# Altium PCB PC110-itx.PcbDoc (part 3 of 16)
Units mm, origin at the board's own origin, x right, y up, seen from the top; angles counter-clockwise.
Board outline 170 x 170 mm, 16 copper layers (FC1, FC2, FC3, FC4, IP1, IC1, IC2, IP2, IP3, IC3, IC4, IP4, BC4, BC3, BC2, BC1), stack 3.903 mm thick; 935 components, 1357 nets, 4698 pads, 3240 vias.
Unrouted connection lines stored in the file: 552.
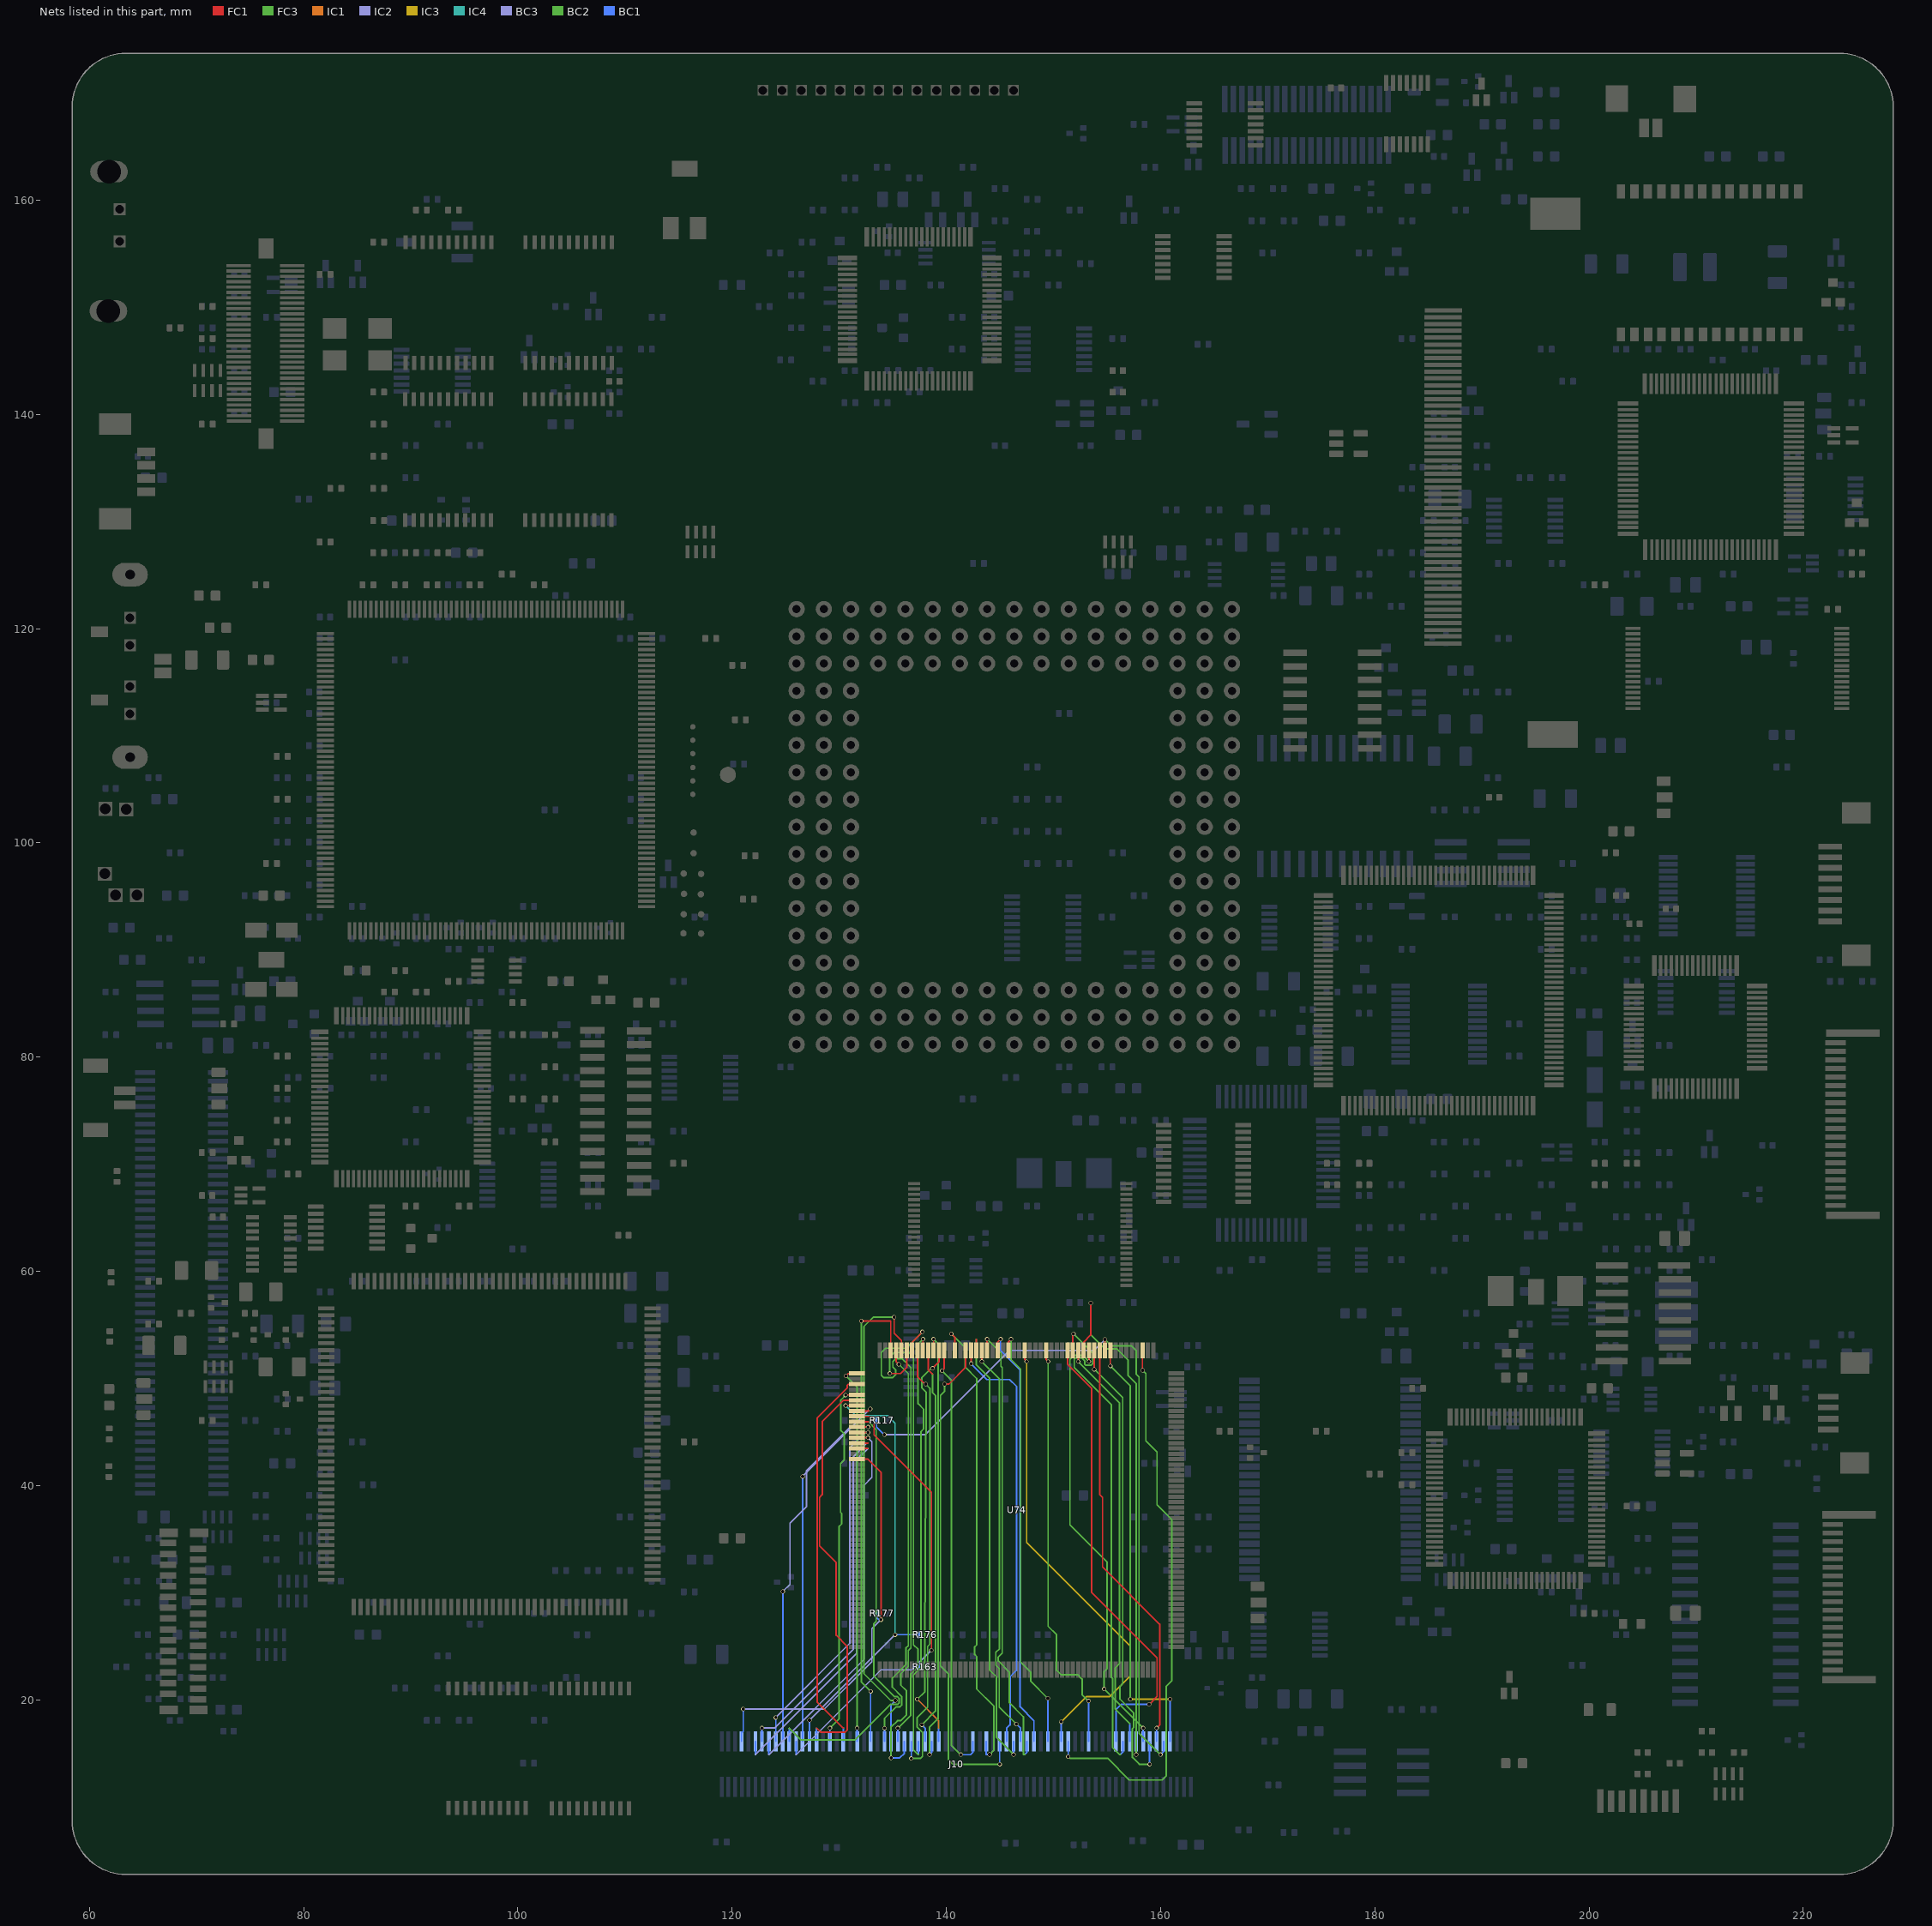
[diagram p17: the nets of this part, all layers, seen from the top]

## Footprints (in the part's own frame and the unit in brackets; to place one, negate y for a bottom-side part, rotate by r counter-clockwise, add the part's x,y. Pads: shape width x height; smd on the part's side, far side on the other; paste and mask are expansions set on the pad) (continued)
QFN-80 [mm]
  rect 0.45x1.8 smd paste-1.8 mask+0: 1(4.55,6.75) 20(-5.15,6.75) 41(-5.15,-6.7) 60(4.55,-6.7)
  rect 0.3x1.8 smd paste-1.8 mask+0: 2(4,6.75) 3(3.5,6.75) 4(3,6.75) 5(2.5,6.75) 6(2,6.75) 7(1.5,6.75) 8(1,6.75) 9(0.5,6.75) 10(0,6.75) 11(-0.5,6.75) 12(-1,6.75) 13(-1.5,6.75) 14(-2,6.75) 15(-2.5,6.75) 16(-3,6.75) 17(-3.5,6.75) 18(-4,6.75) 19(-4.55,6.75) 42(-4.55,-6.7) 43(-4,-6.7) 44(-3.5,-6.7) 45(-3,-6.7) 46(-2.5,-6.7) 47(-2,-6.7) 48(-1.5,-6.7) 49(-1,-6.7) 50(-0.5,-6.7) 51(0,-6.7) 52(0.5,-6.7) 53(1,-6.7) 54(1.5,-6.7) 55(2,-6.7) 56(2.5,-6.7) 57(3,-6.7) 58(3.5,-6.7) 59(4,-6.7)
  rect 1.8x0.45 smd paste-1.8 mask+0: 21(-6.95,4.8) 40(-6.95,-4.8) 61(6.55,-4.8) 80(6.55,4.8)
  rect 1.8x0.3 smd paste-1.8 mask+0: 22(-6.95,4.25) 23(-6.95,3.75) 24(-6.95,3.25) 25(-6.95,2.75) 26(-6.95,2.25) 27(-6.95,1.75) 28(-6.95,1.25) 29(-6.95,0.75) 30(-6.95,0.25) 31(-6.95,-0.25) 32(-6.95,-0.75) 33(-6.95,-1.25) 34(-6.95,-1.75) 35(-6.95,-2.25) 36(-6.95,-2.75) 37(-6.95,-3.25) 38(-6.95,-3.75) 39(-6.95,-4.2) 62(6.55,-4.25) 63(6.55,-3.75) 64(6.55,-3.25) 65(6.55,-2.75) 66(6.55,-2.25) 67(6.55,-1.75) 68(6.55,-1.25) 69(6.55,-0.75) 70(6.55,-0.25) 71(6.55,0.25) 72(6.55,0.75) 73(6.55,1.25) 74(6.55,1.75) 75(6.55,2.25) 76(6.55,2.75) 77(6.55,3.25) 78(6.55,3.75) 79(6.55,4.2)
  silkscreen extent 4.34,4.49 5.06,5.21
QFN-100 [mm]
  rect 0.4x1.9 smd paste-1.9 mask+0: 1(-6.6,-7.575) 25(5.575,-7.575) 51(5.575,7.925) 75(-6.65,7.925)
  rect 0.3x1.9 smd paste-1.9 mask+0: 2(-6,-7.575) 3(-5.5,-7.575) 4(-5,-7.575) 5(-4.5,-7.575) 6(-4,-7.575) 7(-3.5,-7.575) 8(-3,-7.575) 9(-2.5,-7.575) 10(-2,-7.575) 11(-1.5,-7.575) 12(-1,-7.575) 13(-0.5,-7.575) 14(0,-7.575) 15(0.5,-7.575) 16(1,-7.575) 17(1.5,-7.575) 18(2,-7.575) 19(2.5,-7.575) 20(3,-7.575) 21(3.5,-7.575) 22(4,-7.575) 23(4.5,-7.575) 24(5,-7.575) 52(5,7.925) 53(4.5,7.925) 54(4,7.925) 55(3.5,7.925) 56(3,7.925) 57(2.5,7.925) 58(2,7.925) 59(1.5,7.925) 60(1,7.925) 61(0.5,7.925) 62(0,7.925) 63(-0.55,7.925) 64(-1.05,7.925) 65(-1.55,7.925) 66(-2.05,7.925) 67(-2.55,7.925) 68(-3.05,7.925) 69(-3.55,7.925) 70(-4.05,7.925) 71(-4.55,7.925) 72(-5.05,7.925) 73(-5.55,7.925) 74(-6.05,7.925)
  rect 1.9x0.4 smd paste-1.9 mask+0: 26(7.275,-6.075) 50(7.275,6.075) 76(-8.225,6.075) 100(-8.225,-6.075)
  rect 1.9x0.3 smd paste-1.9 mask+0: 27(7.275,-5.5) 28(7.275,-5) 29(7.275,-4.5) 30(7.275,-4) 31(7.275,-3.5) 32(7.275,-3) 33(7.275,-2.5) 34(7.275,-2) 35(7.275,-1.5) 36(7.275,-1) 37(7.275,-0.5) 38(7.275,0) 39(7.275,0.5) 40(7.275,1) 41(7.275,1.5) 42(7.275,2) 43(7.275,2.5) 44(7.275,3) 45(7.275,3.5) 46(7.275,4) 47(7.275,4.5) 48(7.275,5) 49(7.275,5.5) 77(-8.225,5.5) 78(-8.225,5) 79(-8.225,4.5) 80(-8.225,4) 81(-8.225,3.5) 82(-8.225,3) 83(-8.225,2.5) 84(-8.225,2) 85(-8.225,1.5) 86(-8.225,0.95) 87(-8.225,0.5) 88(-8.225,0) 89(-8.225,-0.55) 90(-8.225,-1.05) 91(-8.225,-1.55) 92(-8.225,-2.05) 93(-8.225,-2.5) 94(-8.225,-3) 95(-8.225,-3.5) 96(-8.225,-4.05) 97(-8.225,-4.5) 98(-8.225,-5.05) 99(-8.225,-5.5)
  silkscreen extent -8.89,-8.04 -7.91,-7.06
QFP208 [mm]
  rect 1.6x0.3 smd paste-1.6 mask+0: 1(-15,12.75) 2(-15,12.25) 3(-15,11.75) 4(-15,11.25) 5(-15,10.75) 6(-15,10.25) 7(-15,9.75) 8(-15,9.25) 9(-15,8.75) 10(-15,8.25) 11(-15,7.75) 12(-15,7.25) 13(-15,6.75) 14(-15,6.25) 15(-15,5.75) 16(-15,5.25) 17(-15,4.75) 18(-15,4.25) 19(-15,3.75) 20(-15,3.25) 21(-15,2.75) 22(-15,2.25) 23(-15,1.75) 24(-15,1.25) 25(-15,0.75) 26(-15,0.25) 27(-15,-0.25) 28(-15,-0.75) 29(-15,-1.25) 30(-15,-1.75) 31(-15,-2.25) 32(-15,-2.75) 33(-15,-3.25) 34(-15,-3.75) 35(-15,-4.25) 36(-15,-4.75) 37(-15,-5.25) 38(-15,-5.75) 39(-15,-6.25) 40(-15,-6.75) 41(-15,-7.25) 42(-15,-7.75) 43(-15,-8.25) 44(-15,-8.75) 45(-15,-9.25) 46(-15,-9.75) 47(-15,-10.25) 48(-15,-10.75) 49(-15,-11.25) 50(-15,-11.75) 51(-15,-12.25) 52(-15,-12.75) 105(15,-12.75) 106(15,-12.25) 107(15,-11.75) 108(15,-11.25) 109(15,-10.75) 110(15,-10.25) 111(15,-9.75) 112(15,-9.25) 113(15,-8.75) 114(15,-8.25) 115(15,-7.75) 116(15,-7.25) 117(15,-6.75) 118(15,-6.25) 119(15,-5.75) 120(15,-5.25) 121(15,-4.75) 122(15,-4.25) 123(15,-3.75) 124(15,-3.25) 125(15,-2.75) 126(15,-2.25) 127(15,-1.75) 128(15,-1.25) 129(15,-0.75) 130(15,-0.25) 131(15,0.25) 132(15,0.75) 133(15,1.25) 134(15,1.75) 135(15,2.25) 136(15,2.75) 137(15,3.25) 138(15,3.75) 139(15,4.25) 140(15,4.75) 141(15,5.25) 142(15,5.75) 143(15,6.25) 144(15,6.75) 145(15,7.25) 146(15,7.75) 147(15,8.25) 148(15,8.75) 149(15,9.25) 150(15,9.75) 151(15,10.25) 152(15,10.75) 153(15,11.25) 154(15,11.75) 155(15,12.25) 156(15,12.75)
  rect 0.3x1.6 smd paste-1.6 mask+0: 53(-12.75,-15) 54(-12.25,-15) 55(-11.75,-15) 56(-11.25,-15) 57(-10.75,-15) 58(-10.25,-15) 59(-9.75,-15) 60(-9.25,-15) 61(-8.75,-15) 62(-8.25,-15) 63(-7.75,-15) 64(-7.25,-15) 65(-6.75,-15) 66(-6.25,-15) 67(-5.75,-15) 68(-5.25,-15) 69(-4.75,-15) 70(-4.25,-15) 71(-3.75,-15) 72(-3.25,-15) 73(-2.75,-15) 74(-2.25,-15) 75(-1.75,-15) 76(-1.25,-15) 77(-0.75,-15) 78(-0.25,-15) 79(0.25,-15) 80(0.75,-15) 81(1.25,-15) 82(1.75,-15) 83(2.25,-15) 84(2.75,-15) 85(3.25,-15) 86(3.75,-15) 87(4.25,-15) 88(4.75,-15) 89(5.25,-15) 90(5.75,-15) 91(6.25,-15) 92(6.75,-15) 93(7.25,-15) 94(7.75,-15) 95(8.25,-15) 96(8.75,-15) 97(9.25,-15) 98(9.75,-15) 99(10.25,-15) 100(10.75,-15) 101(11.25,-15) 102(11.75,-15) 103(12.25,-15) 104(12.75,-15) 157(12.75,15) 158(12.25,15) 159(11.75,15) 160(11.25,15) 161(10.75,15) 162(10.25,15) 163(9.75,15) 164(9.25,15) 165(8.75,15) 166(8.25,15) 167(7.75,15) 168(7.25,15) 169(6.75,15) 170(6.25,15) 171(5.75,15) 172(5.25,15) 173(4.75,15) 174(4.25,15) 175(3.75,15) 176(3.25,15) 177(2.75,15) 178(2.25,15) 179(1.75,15) 180(1.25,15) 181(0.75,15) 182(0.25,15) 183(-0.25,15) 184(-0.75,15) 185(-1.25,15) 186(-1.75,15) 187(-2.25,15) 188(-2.75,15) 189(-3.25,15) 190(-3.75,15) 191(-4.25,15) 192(-4.75,15) 193(-5.25,15) 194(-5.75,15) 195(-6.25,15) 196(-6.75,15) 197(-7.25,15) 198(-7.75,15) 199(-8.25,15) 200(-8.75,15) 201(-9.25,15) 202(-9.75,15) 203(-10.25,15) 204(-10.75,15) 205(-11.25,15) 206(-11.75,15) 207(-12.25,15) 208(-12.75,15)
  silkscreen extent -15.7,-14.12 14.12,14.12
R-array#1 [mm]
  rect 0.35x1.2 smd paste-1.2 mask+0: 1(-1.225,-1) 2(-0.425,-1) 3(0.375,-1) 4(1.175,-1) 5(1.175,0.85) 6(0.375,0.85) 7(-0.45,0.85) 8(-1.225,0.85)
R-array#2 [mm]
  rect 0.35x1.2 smd paste-1.2 mask+0: 1(1.225,1) 2(0.425,1) 3(-0.375,1) 4(-1.175,1) 5(-1.175,-0.85) 6(-0.375,-0.85) 7(0.45,-0.85) 8(1.225,-0.85)
R_0402_1005Metric#1 [mm]
  rrect25% 0.54x0.64 smd paste-0.64 mask+0: 1(0.51,0) 2(-0.51,0)
  silkscreen extent -0.95,-0.5 0.95,0.5
R_0402_1005Metric#2 [mm]
  rrect25% 0.54x0.64 smd paste-0.64 mask+0: 1(-0.51,0) 2(0.51,0)
  silkscreen extent -0.95,-0.5 0.95,0.5
R_0603_1608Metric#1 [mm]
  rrect25% 0.8x0.95 smd paste-0.95 mask+0: 1(0.825,0) 2(-0.825,0)
  silkscreen extent -1.5,-0.8 1.5,0.8
R_0603_1608Metric#2 [mm]
  rrect25% 0.8x0.95 smd paste-0.95 mask+0: 1(-0.825,0) 2(0.825,0)
  silkscreen extent -1.5,-0.8 1.5,0.8
R_0805_2012Metric#1 [mm]
  rrect24% 1.025x1.4 smd paste-1.4 mask+0: 1(0.913,0) 2(-0.913,0)
  silkscreen extent -0.23,-0.73 0.23,0.74
R_0805_2012Metric#2 [mm]
  rrect24% 1.025x1.4 smd paste-1.4 mask+0: 1(-0.912,0) 2(0.913,0)
  silkscreen extent -1.7,-1 1.7,1
R_1206_3216Metric [mm]
  rrect22% 1.125x1.75 smd paste-1.75 mask+0: 1(1.462,0) 2(-1.462,0)
  silkscreen extent -2.3,-1.2 2.3,1.2
R_1206_3216Metric_Pad1.30x1.75mm_HandSolder [mm]
  rrect19% 1.3x1.75 smd paste-1.75 mask+0: 1(-1.55,0) 2(1.55,0)
  silkscreen extent -0.73,-0.91 0.73,0.91
"RAM Module" [mm]
  rect 2.3x0.3 smd paste-2.3 mask+0: 1(2.5,7.4) 2(2.5,6.9) 3(2.5,6.4) 4(2.5,5.9) 5(2.5,5.4) 6(2.5,4.9) 7(2.5,4.4) 8(2.5,3.9) 9(2.5,3.4) 10(2.5,2.9) 11(2.55,2.4) 12(2.55,1.9) 13(2.55,1.4) 14(2.55,0.9) 15(2.55,0.4) 16(2.55,-0.1) 17(2.55,-0.6) 18(2.55,-1.1) 19(2.55,-1.6) 20(2.55,-2.1) 21(2.55,-2.6) 22(2.55,-3.1) 23(2.55,-3.6) 24(2.55,-4.1) 25(2.55,-4.6) 26(2.55,-5.1) 27(2.55,-5.6) 28(2.55,-6.1) 29(2.55,-6.6) 30(2.55,-7.1) 31(-2.45,-7.1) 32(-2.45,-6.6) 33(-2.45,-6.1) 34(-2.45,-5.6) 35(-2.45,-5.1) 36(-2.45,-4.6) 37(-2.45,-4.1) 38(-2.45,-3.6) 39(-2.45,-3.1) 40(-2.45,-2.6) 41(-2.45,-2.1) 42(-2.45,-1.6) 43(-2.45,-1.1) 44(-2.45,-0.6) 45(-2.45,-0.1) 46(-2.45,0.4) 47(-2.45,0.9) 48(-2.45,1.4) 49(-2.45,1.9) 50(-2.45,2.4) 51(-2.45,2.9) 52(-2.45,3.4) 53(-2.45,3.9) 54(-2.45,4.4) 55(-2.45,4.9) 56(-2.45,5.4) 57(-2.45,5.9) 58(-2.45,6.4) 59(-2.45,6.9) 60(-2.45,7.4)
  rect 1.4x1.9 smd paste-1.9 mask+0: 61(0,9.05) 62(0,-8.7)
RAMchip [mm]
  rect 0.4x1.3 smd paste-1.3 mask+0: 1(9.225,5.475) 2(8.425,5.475) 3(7.625,5.475) 4(6.825,5.475) 5(6.025,5.475) 6(5.225,5.475) 7(4.425,5.475) 8(3.625,5.475) 9(2.825,5.475) 10(2.025,5.475) 11(1.175,5.475) 12(-2.025,5.475) 13(-2.825,5.475) 14(-3.625,5.475) 15(-4.425,5.475) 16(-5.225,5.475) 17(-6.025,5.475) 18(-6.825,5.475) 19(-7.625,5.475) 20(-8.425,5.475) 21(-9.225,5.475) 22(-10.025,5.475) 23(-10.025,-5.8) 24(-9.225,-5.8) 25(-8.425,-5.8) 26(-7.625,-5.8) 27(-6.825,-5.8) 28(-6.025,-5.8) 29(-5.225,-5.8) 30(-4.425,-5.8) 31(-3.625,-5.8) 32(-2.775,-5.8) 33(-2.025,-5.8) 34(1.175,-5.8) 35(2.025,-5.8) 36(2.825,-5.8) 37(3.625,-5.8) 38(4.425,-5.8) 39(5.225,-5.8) 40(6.025,-5.8) 41(6.825,-5.8) 42(7.625,-5.8) 43(8.425,-5.8) 44(9.225,-5.8)
  silkscreen extent 8.67,3.56 9.39,4.29
SanDisk [mm]
  rect 0.8x1.3 smd paste-1.3 mask+0: 1(7.65,6.375) 2(6.35,6.375) 3(5.1,6.375) 4(3.8,6.375) 5(2.55,6.375) 6(1.25,6.375) 7(0,6.375) 8(-1.3,6.375) 9(-2.55,6.375) 10(-3.85,6.375) 11(-5.1,6.375) 12(-6.4,6.375) 13(-7.65,6.375) 14(-8.9,6.375) 15(-8.9,-6.975) 16(-7.65,-6.975) 17(-6.35,-6.975) 18(-5.1,-6.975) 19(-3.8,-6.975) 20(-2.55,-6.975) 21(-1.25,-6.975) 22(0,-6.975) 23(1.3,-6.975) 24(2.55,-6.975) 25(3.85,-6.975) 26(5.1,-6.975) 27(6.4,-6.975) 28(7.65,-6.975)
  silkscreen extent 7.14,4.31 7.86,5.04
SOIC-8 [mm]
  rect 3x0.6 smd paste-3 mask+0: 1(2.95,-1.95) 2(2.95,-0.65) 3(2.95,0.6) 4(2.95,1.9) 5(-2.9,1.905) 6(-2.9,0.635) 7(-2.9,-0.65) 8(-2.9,-1.95)
  silkscreen extent -1.95,-2.8 2.94,2.56
SOIC-8-narrow [mm]
  rect 2.5x0.6 smd paste-2.5 mask+0: 1(2.8,-1.8) 2(2.85,-0.5) 3(2.85,0.75) 4(2.85,2) 5(-2.3,2) 6(-2.3,0.75) 7(-2.35,-0.5) 8(-2.35,-1.75)
  silkscreen extent 0.83,-1.57 1.47,-0.93
soic-8-small [mm]
  rect 1.3x0.35 smd paste-1.3 mask+0: 1(2.95,-0.95) 2(2.95,-0.3) 3(2.95,0.35) 4(2.95,1) 5(-2.95,1) 6(-2.95,0.35) 7(-2.95,-0.3) 8(-2.95,-0.95)
  silkscreen extent 1.67,-0.98 2.03,-0.62
SOIC-16W [mm]
  rect 3x0.6 smd paste-3 mask+0: 1(-2.85,4.445) 2(-2.85,3.175) 3(-2.85,1.905) 4(-2.85,0.65) 5(-2.85,-0.635) 6(-2.85,-1.9) 7(-2.85,-3.175) 8(-2.9,-4.445) 9(3,-4.45) 10(3,-3.175) 11(3,-1.9) 12(3,-0.65) 13(3,0.65) 14(3,1.95) 15(3,3.175) 16(2.95,4.45)
  silkscreen extent -3.79,-5.21 2.76,5.34
SOP48 [mm]
  rect 1.9x0.6 smd paste-1.9 mask+0: 1(-7.3,9.55) 2(-7.3,8.75) 3(-7.3,7.95) 4(-7.3,7.15) 5(-7.3,6.35) 6(-7.3,5.55) 7(-7.3,4.75) 8(-7.3,3.95) 9(-7.3,3.15) 10(-7.3,2.35) 11(-7.3,1.55) 12(-7.3,0.75) 13(-7.3,-0.05) 14(-7.3,-0.85) 15(-7.3,-1.65) 16(-7.3,-2.45) 17(-7.3,-3.25) 18(-7.3,-4.05) 19(-7.3,-4.85) 20(-7.3,-5.65) 21(-7.3,-6.45) 22(-7.3,-7.25) 23(-7.3,-8.05) 24(-7.3,-8.85) 25(7.75,-8.85) 26(7.75,-8.05) 27(7.75,-7.25) 28(7.75,-6.45) 29(7.75,-5.65) 30(7.75,-4.85) 31(7.75,-4.05) 32(7.75,-3.25) 33(7.75,-2.45) 34(7.75,-1.65) 35(7.75,-0.85) 36(7.75,-0.05) 37(7.75,0.75) 38(7.75,1.55) 39(7.75,2.35) 40(7.75,3.15) 41(7.75,3.95) 42(7.775,4.75) 43(7.775,5.55) 44(7.775,6.35) 45(7.775,7.15) 46(7.775,7.95) 47(7.775,8.75) 48(7.775,9.55)
  silkscreen extent -5.33,8.27 -4.27,9.33
SOP-16 [mm]
  rect 2.2x0.6 smd paste-2.2 mask+0: 1(3.45,-4.45) 2(3.45,-3.175) 3(3.45,-1.9) 4(3.45,-0.635) 5(3.45,0.635) 6(3.45,1.905) 7(3.45,3.2) 8(3.45,4.445) 9(-3.5,4.445) 10(-3.5,3.175) 11(-3.5,1.905) 12(-3.5,0.635) 13(-3.5,-0.635) 14(-3.5,-1.95) 15(-3.5,-3.2) 16(-3.5,-4.45)
  silkscreen extent -2.39,-5.34 3.4,5.26
SOP-24 [mm]
  rect 0.6x2.5 smd paste-2.5 mask+0: 1(-6.7,-4.75) 2(-5.45,-4.75) 3(-4.15,-4.75) 4(-2.85,-4.75) 5(-1.6,-4.75) 6(-0.3,-4.75) 7(0.95,-4.75) 8(2.2,-4.75) 9(3.5,-4.75) 10(4.75,-4.75) 11(6.05,-4.75) 12(7.3,-4.75) 13(7.3,6.05) 14(6.05,6.05) 15(4.75,6.05) 16(3.5,6.05) 17(2.25,6.05) 18(0.95,6.05) 19(-0.3,6.05) 20(-1.6,6.05) 21(-2.85,6.05) 22(-4.15,6.05) 23(-5.4,6.05) 24(-6.7,6.05)
  silkscreen extent -7.12,-2.82 -6.28,-1.98
SOT-23#1 [mm]
  rrect25% 1.475x0.6 smd paste-1.475 mask+0: 1(0.938,-0.95) 2(0.938,0.95) 3(-0.937,0)
  silkscreen extent -0.65,-1.84 1.4,1.56
SOT-23#2 [mm]
  rrect25% 0.9x0.8 smd paste-0.9 mask+0: 1(1,-0.95) 2(1,0.95) 3(-1,0)
  silkscreen extent -1.8,-1.8 1.8,1.8
SOT-23#3 [mm]
  rrect25% 0.9x0.8 smd paste-0.9 mask+0: 1(-1,0.95) 2(-1,-0.95) 3(1,0)
  silkscreen extent -1.8,-1.8 1.8,1.8
SOT-23-5#1 [mm]
  rrect25% 1.325x0.6 smd paste-1.325 mask+0: 1(-1.138,0.95) 2(-1.138,0) 3(-1.138,-0.95) 4(1.138,-0.95) 5(1.138,0.95)
  silkscreen extent -1.54,-1.56 0.8,1.84
SOT-23-5#2 [mm]
  rrect25% 1.325x0.6 smd paste-1.325 mask+0: 1(1.137,-0.95) 2(1.137,0) 3(1.137,0.95) 4(-1.137,0.95) 5(-1.137,-0.95)
  silkscreen extent -0.8,-1.84 1.54,1.56
SOT-89-3#1 [mm]
  rrect25% 1.3x0.9 smd paste-1.3 mask+0: 1(-1.95,1.5) 3(-1.95,-1.5)
  rect 1.475x0.9 smd paste-1.475 mask+0: 2(-1.862,0)
  FC1 region: 2,-0.867 -1.125,-0.867 -1.125,0.867 2,0.867
  silkscreen extent -2.01,-2.36 1.36,2.54
SOT-89-3#2 [mm]
  rrect25% 1.3x0.9 smd paste-1.3 mask+0: 1(1.95,-1.5) 3(1.95,1.5)
  rect 1.475x0.9 smd paste-1.475 mask+0: 2(1.862,0)
  FC1 region: -2,-0.867 1.125,-0.867 1.125,0.867 -2,0.867
  silkscreen extent -1.36,-2.54 2.01,2.36
SOT-353#1 [mm]
  rect 1.2x0.4 smd paste-1.2 mask+0: 1(-0.85,0.65) 2(-0.85,0) 3(-0.85,-0.65) 4(0.85,-0.65) 5(0.85,0.65)
  silkscreen extent -1.32,-1.16 0.7,1.44
SOT-353#2 [mm]
  rect 1.2x0.4 smd paste-1.2 mask+0: 1(0.85,-0.65) 2(0.85,0) 3(0.85,0.65) 4(-0.85,0.65) 5(-0.85,-0.65)
  silkscreen extent -0.7,-1.44 1.32,1.16
SOT-416#1 [mm]
  rrect25% 0.6x0.5 smd paste-0.6 mask+0: 1(0.65,-0.5) 2(0.65,0.5) 3(-0.65,0)
  silkscreen extent -0.51,-0.96 1.45,0.96
SOT-416#2 [mm]
  rrect25% 0.6x0.5 smd paste-0.6 mask+0: 1(-0.65,0.5) 2(-0.65,-0.5) 3(0.65,0)
  silkscreen extent -1.45,-0.96 0.51,0.96
SOT-416L#1 [mm]
  rect 0.6x1.1 smd paste-1.1 mask+0: 1(-0.45,0.75) 2(0.55,0.75) 3(0.05,-0.8)
SOT-416L#2 [mm]
  rect 0.6x1.1 smd paste-1.1 mask+0: 1(0.45,-0.75) 2(-0.55,-0.75) 3(-0.05,0.8)
SOT-523 [mm]
  rrect25% 0.51x0.4 smd paste-0.51 mask+0: 1(0.645,-0.5) 2(0.645,0.5) 3(-0.645,0)
  silkscreen extent -0.65,-0.9 1.4,0.9
SPKR [mm]
  rect 0.8x2 smd paste-2 mask+0: 1(0.65,-2.2) 2(-0.65,-2.2)
  rect 1.3x2.3 smd paste-2.3 mask+0: 3(3,0.5) 4(-3,0.5)
  Edge.Cuts circle w0.254: c-1.7,1.75 r0.424
  Edge.Cuts circle w0.254: c1.7,1.75 r0.424
sso-8#1 [mm]
  rect 1.2x0.4 smd paste-1.2 mask+0: 1(-1.75,0.95) 2(-1.75,0.3) 3(-1.75,-0.35) 4(-1.75,-1) 5(1.75,-1) 6(1.75,-0.35) 7(1.75,0.3) 8(1.75,0.95)
  silkscreen extent -1.01,0.59 -0.69,0.91
sso-8#2 [mm]
  rect 1.2x0.4 smd paste-1.2 mask+0: 1(1.75,-0.95) 2(1.75,-0.3) 3(1.75,0.35) 4(1.75,1) 5(-1.75,1) 6(-1.75,0.35) 7(-1.75,-0.3) 8(-1.75,-0.95)
  silkscreen extent 0.69,-0.91 1.01,-0.59
SSOP-8_2.95x2.8mm_P0.65mm [mm]
  rect 1.6x0.3 smd paste-1.6 mask+0: 1(1.7,-0.975) 2(1.7,-0.325) 3(1.7,0.325) 4(1.7,0.975) 5(-1.7,0.975) 6(-1.7,0.325) 7(-1.7,-0.325) 8(-1.7,-0.975)
  silkscreen extent -1.5,-1.73 2.09,1.5
SSOP-24_5.3x8.2mm_P0.65mm [mm]
  rect 1.75x0.45 smd paste-1.75 mask+0: 1(3.6,-3.575) 2(3.6,-2.925) 3(3.6,-2.275) 4(3.6,-1.625) 5(3.6,-0.975) 6(3.6,-0.325) 7(3.6,0.325) 8(3.6,0.975) 9(3.6,1.625) 10(3.6,2.275) 11(3.6,2.925) 12(3.6,3.575) 13(-3.6,3.575) 14(-3.6,2.925) 15(-3.6,2.275) 16(-3.6,1.625) 17(-3.6,0.975) 18(-3.6,0.325) 19(-3.6,-0.325) 20(-3.6,-0.975) 21(-3.6,-1.625) 22(-3.6,-2.275) 23(-3.6,-2.925) 24(-3.6,-3.575)
  silkscreen extent -2.87,-4.41 3.61,4.33
SSOP-28 [mm]
  rect 0.6x2.4 smd paste-2.4 mask+0: 1(-7.85,-5.25) 2(-6.6,-5.25) 3(-5.3,-5.25) 4(-4.05,-5.25) 5(-2.75,-5.25) 6(-1.5,-5.25) 7(-0.2,-5.25) 8(1.05,-5.25) 9(2.35,-5.25) 10(3.6,-5.25) 11(4.9,-5.25) 12(6.15,-5.25) 13(7.4,-5.25) 14(8.7,-5.25) 15(8.7,4.175) 16(7.45,4.175) 17(6.15,4.175) 18(4.9,4.175) 19(3.6,4.175) 20(2.35,4.175) 21(1.1,4.175) 22(-0.2,4.175) 23(-1.5,4.175) 24(-2.8,4.175) 25(-4.05,4.175) 26(-5.3,4.175) 27(-6.6,4.175) 28(-7.85,4.175)
  silkscreen extent -7.78,-3.48 -6.62,-2.32
Switch [mm]
  rect 1.1x1.1 hole 0.8 paste-2539.97 mask+0: 1(0.95,3.25) 2(0.95,0.25)
  rrect100% 3.5x2 hole 2.2 slot 0.8 at 90 deg paste-2539.97 mask+0: 3(-0.1,-6.25) 3(-0.05,6.75)
TestPoint_Pad_D1.5mm [mm]
  round 1.5 smd paste-1.5 mask+0: 1(0,0)
  silkscreen extent -0.95,-0.95 0.95,0.95
TSOP-5_1.65x3.05mm_P0.95mm [mm]
  rect 0.7x0.51 smd paste-0.7 mask+0: 1(1.16,-0.95) 2(1.16,0) 3(1.16,0.95) 4(-1.16,0.95) 5(-1.16,-0.95)
  silkscreen extent -0.8,-1.78 1.49,1.6
TSOT-23#1 [mm]
  rrect25% 1.22x0.65 smd paste-1.22 mask+0: 1(1.31,-0.95) 2(1.31,0.95) 3(-1.31,0)
  silkscreen extent -2.2,-1.8 2.2,1.8
TSOT-23#2 [mm]
  rect 0.7x1.4 smd paste-1.4 mask+0: 1(-0.65,0.9) 2(0,-1) 3(0.65,0.9)
TSOT-23#3 [mm]
  rect 0.7x1.4 smd paste-1.4 mask+0: 1(0.65,-0.9) 2(0,1) 3(-0.65,-0.9)
TSSOP-14_4.4x5mm_P0.65mm#1 [mm]
  rrect25% 1.475x0.4 smd paste-1.475 mask+0: 1(2.862,-1.95) 2(2.862,-1.3) 3(2.862,-0.65) 4(2.862,0) 5(2.862,0.65) 6(2.862,1.3) 7(2.862,1.95) 8(-2.863,1.95) 9(-2.863,1.3) 10(-2.863,0.65) 11(-2.863,0) 12(-2.863,-0.65) 13(-2.863,-1.3) 14(-2.863,-1.95)
  silkscreen extent -2.2,-2.74 3.14,2.61
TSSOP-14_4.4x5mm_P0.65mm#2 [mm]
  rrect25% 1.475x0.4 smd paste-1.475 mask+0: 1(-2.862,1.95) 2(-2.862,1.3) 3(-2.862,0.65) 4(-2.862,0) 5(-2.862,-0.65) 6(-2.862,-1.3) 7(-2.862,-1.95) 8(2.862,-1.95) 9(2.862,-1.3) 10(2.862,-0.65) 11(2.862,0) 12(2.862,0.65) 13(2.862,1.3) 14(2.862,1.95)
  silkscreen extent -3.14,-2.61 2.2,2.74
TSSOP-16_4.4x5mm_P0.65mm [mm]
  rrect25% 1.475x0.4 smd paste-1.475 mask+0: 1(2.862,-2.275) 2(2.862,-1.625) 3(2.862,-0.975) 4(2.862,-0.325) 5(2.862,0.325) 6(2.862,0.975) 7(2.862,1.625) 8(2.862,2.275) 9(-2.863,2.275) 10(-2.863,1.625) 11(-2.863,0.975) 12(-2.863,0.325) 13(-2.863,-0.325) 14(-2.863,-0.975) 15(-2.863,-1.625) 16(-2.863,-2.275)
  silkscreen extent -2.2,-2.74 4.19,2.73
TSSOP-20_4.4x6.5mm_P0.65mm [mm]
  rrect25% 1.475x0.4 smd paste-1.475 mask+0: 1(2.862,-2.925) 2(2.862,-2.275) 3(2.862,-1.625) 4(2.862,-0.975) 5(2.862,-0.325) 6(2.862,0.325) 7(2.862,0.975) 8(2.862,1.625) 9(2.862,2.275) 10(2.862,2.925) 11(-2.863,2.925) 12(-2.863,2.275) 13(-2.863,1.625) 14(-2.863,0.975) 15(-2.863,0.325) 16(-2.863,-0.325) 17(-2.863,-0.975) 18(-2.863,-1.625) 19(-2.863,-2.275) 20(-2.863,-2.925)
  silkscreen extent -2.2,-3.38 4.19,3.39
TSSOP-24_6.1x7.8mm_P0.65mm [mm]
  rrect25% 1.475x0.4 smd paste-1.475 mask+0: 1(-3.712,3.575) 2(-3.712,2.925) 3(-3.712,2.275) 4(-3.712,1.625) 5(-3.712,0.975) 6(-3.712,0.325) 7(-3.712,-0.325) 8(-3.712,-0.975) 9(-3.712,-1.625) 10(-3.712,-2.275) 11(-3.712,-2.925) 12(-3.712,-3.575) 13(3.712,-3.575) 14(3.712,-2.925) 15(3.712,-2.275) 16(3.712,-1.625) 17(3.712,-0.975) 18(3.712,-0.325) 19(3.712,0.325) 20(3.712,0.975) 21(3.712,1.625) 22(3.712,2.275) 23(3.712,2.925) 24(3.712,3.575)
  silkscreen extent -5.04,-4.04 3.05,4.04
TSSOP-30_6.1x9.7mm_P0.65mm [mm]
  rrect25% 1.475x0.4 smd paste-1.475 mask+0: 1(3.713,-4.55) 2(3.713,-3.9) 3(3.713,-3.25) 4(3.713,-2.6) 5(3.713,-1.95) 6(3.713,-1.3) 7(3.713,-0.65) 8(3.713,0) 9(3.713,0.65) 10(3.713,1.3) 11(3.713,1.95) 12(3.713,2.6) 13(3.713,3.25) 14(3.713,3.9) 15(3.713,4.55) 16(-3.712,4.55) 17(-3.712,3.9) 18(-3.712,3.25) 19(-3.712,2.6) 20(-3.712,1.95) 21(-3.712,1.3) 22(-3.712,0.65) 23(-3.712,0) 24(-3.712,-0.65) 25(-3.712,-1.3) 26(-3.712,-1.95) 27(-3.712,-2.6) 28(-3.712,-3.25) 29(-3.712,-3.9) 30(-3.712,-4.55)
  silkscreen extent -3.05,-5.01 5.04,5.01
XTAL-1 [mm]
  rect 2.4x2.8 smd paste-2.8 mask+0: 1(3.25,-0.1) 2(-3.25,-0.1)
  rect 1.5x2.4 smd paste-2.4 mask-2.4: 3(-0.05,0)
  FC1 region: -4.05,1.65 -1.7,1.65 -1.7,-1.8 -4.05,-1.8 -4.05,-2.4 4.05,-2.4 4.05,-1.8 1.7,-1.8 1.7,1.65 4.05,1.65 4.05,2.2 -4.05,2.2
XTAL-2 [mm]
  rect 1.5x2.1 smd paste-2.1 mask+0: 1(1.3,-5.55) 2(-1.25,-5.55)
  rect 2.4x1.5 smd paste-2.4 mask-2.4: 3(0.05,0)
  FC1 region: 1.4,-3.45 1.2,-3.45 1.2,-4.15 0.2,-4.15 0.2,-6.5 -0.15,-6.5 -0.15,-4.15 -1.1,-4.15 -1.1,-3.5 -1.3,-3.5 -1.3,6.75 1.4,6.75
XTAL-3 [mm]
  rect 2x1.4 smd paste-2 mask+0: 1(1.45,2.75) 2(1.45,-2.75) 3(-1.45,-2.75) 4(-1.45,2.75)
  rect 2.4x1.5 smd paste-2.4 mask-2.4: 5(0,0)
  FC1 region: 1.5,3.8 0.1,3.8 0.1,1.7 1.5,1.7 1.5,-1.7 0.1,-1.7 0.1,-3.8 1.55,-3.8 1.55,-3.9 -1.55,-3.9 -1.55,-3.8 -0.1,-3.8 -0.1,-1.7 -1.5,-1.7 -1.5,1.7 -0.1,1.7 -0.1,3.8 -1.55,3.8 -1.55,3.95 1.5,3.95
XTAL-4 [mm]
  rect 4x1.5 smd paste-4 mask+0: 1(0.15,-2.2) 2(0.15,2.1) 3(0.15,-0.08)
XTAL-5 [mm]
  rect 1.5x2.4 smd paste-2.4 mask+0: 1(0,3.2) 2(0,-3.4)
  rect 1.5x2.4 smd paste-2.4 mask-2.4: 3(0,0)
  FC1 region: 1.15,1.65 -1.15,1.65 -1.15,3.3 -1.3,3.3 -1.3,-3.5 -1.1,-3.5 -1.1,-1.85 1.1,-1.85 1.1,-3.5 1.3,-3.5 1.3,3.35 1.15,3.35
XTAL-6 [mm]
  rect 2.4x2.8 smd paste-2.8 mask+0: 1(-3.25,0.1) 2(3.25,0.1)
  rect 1.5x2.4 smd paste-2.4 mask-2.4: 3(0.05,0)
  FC1 region: 1.725,1.8 1.7,1.8 1.7,-1.65 4.05,-1.65 4.05,-2.2 -4.05,-2.2 -4.05,-1.65 -1.7,-1.65 -1.7,1.8 -1.7,2.4 1.725,2.4

## Part data
C1 C2 C3 C4 C5 C6 C7 C8 C15 C16 C17 C19 C20 C24 C26 C27 C28 C29 C31 C32 C33 C34 C35 C37 C38 C39 C40 C41 C42 C43 C44 C48 C50 C52 C53 C55 C56 C58 C61 C62 C64 C65 C67 C68 C69 C70 C71 C72 C73 C74 C75 C76 C77 C78 C81 C82 C83 C84 C85 C86 C87 C88 C90 C91 C92 C93 C94 C95 C96 C97 C98 C99 C101 C102 C103 C104 C105 C106 C107 C108 C109 C110 C111 C112 C113 C114 C115 C116 C117 C119 C120 C121 C122 C123 C125 C126 C127 C128 C129 C133 C136 C137 C138 C139 C141 C142 C143 C144 C145 C146 C148 C149 C151 C154 C155 C156 C157 C159 C163 C165 C167 C169 C170 C171 C172 C173 C174 C175 C177 C178 C179 C180 C181 C182 C183 C184 C185 C186 C187 C188 C189 C191 C192 C193 C194 C195 C196 C198 C199 C203 C205 C208 C211 C212 C213 C215 C216 C217 C219 C220 C223 C227 C228 C230 C231 C234 C235 C236 C237 C239 C241 C242 C243 C244 C247 C249 C250 C251 C252 C253 C254 C255 C256 C257 C258 C260 C261 C263 C264 C265 C266 C267 C268 C269 C270 C271 C272 C274 C275 C276 C278 C279 C280 C281 C282 C283: library part C_0402_1005Metric, "Capacitor SMD 0402 (1005 Metric), square (rectangular) end terminal, IPC_7351 nominal, (Body size source: IPC-SM-782 page 76, https://www.pcb-3d.com/wordpress/wp-content/uploads/ipc-sm-782a_amendment_1_and_2.pdf), generated with kicad-footprint-generator"
  C6 C8 C16 C19 C27 C28 C35 C44 C50 C52 C53 C55 C56 C58 C61 C62 C68 C69 C70 C71 C74 C76 C78 C82 C94 C96 C97 C98 C99 C102 C103 C104 C105 C106 C107 C111 C112 C114 C115 C116 C117 C119 C121 C122 C123 C125 C127 C128 C133 C137 C138 C139 C141 C142 C143 C144 C145 C146 C148 C149 C151 C155 C157 C159 C165 C203 C205 C208 C211 C212 C213 C215 C216 C217 C219 C220 C223 C231 C236 C241 C244 C247 C250 C251 C252 C253 C255 C263 C266 C267 C269 C271 C274 C275 C276 C280: ki_fp_filters=C_*
  C270: ki_fp_filters=R_*
C9 C10 C14 C23 C30 C36 C47 C51 C152 C160 C161 C162 C200 C201 C204 C206 C209 C210 C214 C232: library part C_1206_3216Metric, "Capacitor SMD 1206 (3216 Metric), square (rectangular) end terminal, IPC_7351 nominal, (Body size source: IPC-SM-782 page 76, https://www.pcb-3d.com/wordpress/wp-content/uploads/ipc-sm-782a_amendment_1_and_2.pdf), generated with kicad-footprint-generator"
  C9 C14 C152 C161 C204 C209 C214: ki_fp_filters=C_*
C11 C12 C13 C18 C21 C22 C25 C45 C46 C57 C59 C60 C63 C66 C79 C80 C89 C100 C124 C130 C131 C132 C134 C140 C147 C150 C153 C158 C164 C166 C168 C176 C190 C197 C202 C207 C218 C221 C222 C224 C225 C226 C229 C233 C238 C240 C245 C246 C248 C259 C273 C277: library part C_0603_1608Metric, "Capacitor SMD 0603 (1608 Metric), square (rectangular) end terminal, IPC_7351 nominal, (Body size source: IPC-SM-782 page 76, https://www.pcb-3d.com/wordpress/wp-content/uploads/ipc-sm-782a_amendment_1_and_2.pdf), generated with kicad-footprint-generator"
  C57 C59 C60 C63 C66 C79 C80 C100 C130 C131 C132 C134 C140 C153 C158 C164 C248 C277: ki_fp_filters=C_*
C49 C54 C118 C135 C262: library part C_0805_2012Metric, "Capacitor SMD 0805 (2012 Metric), square (rectangular) end terminal, IPC_7351 nominal, (Body size source: IPC-SM-782 page 76, https://www.pcb-3d.com/wordpress/wp-content/uploads/ipc-sm-782a_amendment_1_and_2.pdf, https://docs.google.com/spreadsheets/d/1BsfQQcO9C6DZCsRaXUlFlo91Tg2WpOkGARC1WS5S8t0/edit?usp=sharing), generated with kicad-footprint-generator"
  C54 C262: ki_fp_filters=C_*
D1 D3 D5 D6 D7 D8 D9 D11 D12 D16 D18 D21 D22 D24 D25 D26 D27 D28 D29 D34 D35 Q8 Q17: library part 3D
  D6 D7: ki_fp_filters="TO-???* *_Diode_* *SingleDiode* D_*"
D2 D4 D10 D13 D14 D15 D17 D19 D20 D30 D31 D32 D37 D40 D42 D43 D45 D46 D49 D58 D59 Q4 Q5 Q6 Q22: library part SOT-416L
D23 D36 D38 D41 D44 D47 D48 D50 D51: library part D_0603_1608Metric, "Diode SMD 0603 (1608 Metric), square (rectangular) end terminal, IPC_7351 nominal, (Body size source: http://www.tortai-tech.com/upload/download/2011102023233369053.pdf), generated with kicad-footprint-generator", ki_fp_filters="TO-???* *_Diode_* *SingleDiode* D_*"
D33 D52 D53 D54 D56 D57 Q2 Q7 Q10 Q12 Q14 Q15 Q18 Q19 Q21 Q23 Q26 Q27 Q28 Q30 Q32 Q38: library part SOT-416, "SOT-416, https://www.nxp.com/docs/en/package-information/SOT416.pdf"
  D52 D53 D54 D56 D57: ki_fp_filters=SOT?323*
  Q2 Q7 Q10 Q12 Q14 Q18 Q19 Q26 Q27 Q38: ki_fp_filters=SOT?23*
D39 D55: library part Diode, ki_fp_filters="TO-???* *_Diode_* *SingleDiode* D_*"
D60: library part SOT-23, "SOT, 3 Pin (JEDEC TO-236 Var AB https://www.jedec.org/document_search?search_api_views_fulltext=TO-236), generated with kicad-footprint-generator ipc_gullwing_generator.py"
EM1 EM2 EM3 EM4 EM5 RA1 RA2 RA3 RA4 RA5: library part R-array
  RA1 RA2 RA3 RA4 RA5: ki_fp_filters="DIP* SOIC* R*Array*Concave* R*Array*Convex* MSOP*"
F1 F2 F3 F4: library part Fuse_1206_3216Metric, "Fuse SMD 1206 (3216 Metric), square (rectangular) end terminal, IPC_7351 nominal, (Body size source: http://www.tortai-tech.com/upload/download/2011102023233369053.pdf), generated with kicad-footprint-generator", ki_fp_filters=*Fuse*
J1: library part PS2
J2: library part LCD_connector, ki_fp_filters=Connector*:*_1x??_*
J3: library part Audio-Jack, ki_fp_filters=Jack*
J4: library part connector-4, ki_fp_filters=Connector*:*_1x??_*
J5: library part PSU_Connector, ki_fp_filters=Connector*:*_2x??_*
J6: library part BridgeBatt, ki_fp_filters=Connector*:*_1x??_*
J7: library part SPKR, ki_fp_filters=Connector*:*_1x??_*
J8: library part Modem-Connector
J9: library part Debug-10
J10: library part PCMCIA
J11: library part CF-card
J12: library part Debug-6
J13: library part "Docking Port"
J14: library part TestPoint_Pad_D1.5mm, "SMD pad as test Point, diameter 1.5mm"
J15: library part "RAM Module"
J16: library part Flat-20, ki_fp_filters=Connector*:*_1x??_*
J17: library part Flat-8, ki_fp_filters=Connector*:*_1x??_*
J18: library part Flat-4, ki_fp_filters=Connector*:*_1x??_*
J19: library part Flat-18, ki_fp_filters=Connector*:*_1x??_*
L1 L2 L3 L5 L6 L7 L8 L11 L13 L14 L15 L16 L17 L18: library part L_0603_1608Metric, "Inductor SMD 0603 (1608 Metric), square (rectangular) end terminal, IPC_7351 nominal, (Body size source: http://www.tortai-tech.com/upload/download/2011102023233369053.pdf), generated with kicad-footprint-generator"
  L1: ki_fp_filters="Choke_* *Coil* Inductor_* L_*"
L4: library part L_1210_3225Metric, "Inductor SMD 1210 (3225 Metric), square (rectangular) end terminal, IPC_7351 nominal, (Body size source: http://www.tortai-tech.com/upload/download/2011102023233369053.pdf), Alternate KiCad Library", ki_fp_filters="Choke_* *Coil* Inductor_* L_*"
L9 L10 L12: library part L_0805_2012Metric, "Inductor SMD 0805 (2012 Metric), square (rectangular) end terminal, IPC_7351 nominal, (Body size source: IPC-SM-782 page 80, https://www.pcb-3d.com/wordpress/wp-content/uploads/ipc-sm-782a_amendment_1_and_2.pdf), generated with kicad-footprint-generator"
  L12: ki_fp_filters="Choke_* *Coil* Inductor_* L_*"
Q1 Q11 Q13 Q24 Q29 Q31: library part SOT-23, "SOT-23, Standard, Alternate KiCad Library"
  Q11 Q13: ki_fp_filters=SOT?23*
  Q24 Q31: ki_fp_filters="SOT?23* SC?59*"
  Q29: ki_fp_filters="SOT* SC*"
Q3 Q25 Q33 Q34 Q37: library part SOT-89-3, "SOT-89-3, http://ww1.microchip.com/downloads/en/DeviceDoc/3L_SOT-89_MB_C04-029C.pdf"
  Q3: ki_fp_filters=TO?92*
Q9 Q35 Q43 Q44: library part SOT-523, "SOT523, https://www.diodes.com/assets/Package-Files/SOT523.pdf", ki_fp_filters=SOT?23*
Q16: library part TSOT-23, "3-pin TSOT23 package, http://www.analog.com.tw/pdf/All_In_One.pdf, Alternate KiCad Library"
Q20 Q36: library part TSOT-23, "3-pin TSOT23 package, http://www.analog.com.tw/pdf/All_In_One.pdf"
Q39 Q40 Q41 Q42: library part TSOT-23
R1 R2 R3 R4 R5 R6 R7 R8 R9 R10 R11 R12 R13 R14 R15 R16 R17 R18 R19 R20 R21 R22 R23 R24 R25 R26 R27 R29 R30 R31 R32 R33 R34 R35 R36 R37 R38 R39 R40 R41 R42 R43 R44 R45 R46 R47 R48 R49 R50 R51 R52 R53 R54 R55 R56 R57 R58 R59 R60 R61 R62 R63 R64 R65 R66 R67 R69 R70 R71 R72 R73 R74 R75 R76 R77 R78 R79 R80 R81 R82 R83 R84 R85 R86 R87 R88 R89 R90 R91 R92 R93 R94 R95 R96 R97 R98 R99 R100 R101 R102 R103 R104 R105 R106 R107 R108 R109 R110 R112 R113 R114 R115 R116 R117 R118 R119 R120 R121 R122 R123 R124 R125 R126 R127 R128 R129 R130 R131 R132 R133 R134 R135 R136 R137 R138 R139 R140 R141 R142 R143 R144 R145 R146 R147 R148 R149 R150 R151 R152 R153 R154 R155 R156 R157 R158 R159 R160 R161 R162 R163 R164 R165 R166 R167 R168 R169 R170 R171 R172 R173 R174 R175 R176 R177 R178 R179 R180 R181 R182 R183 R184 R185 R186 R187 R188 R189 R190 R191 R192 R193 R194 R195 R196 R197 R198 R199 R200 R201 R202 R203 R204 R205 R206 R207 R208 R209 R210 R211 R212 R213 R214 R215 R216 R217 R218 R219 R220 R221 R222 R223 R224 R225 R227 R228 R229 R232 R233 R234 R235 R236 R237 R240 R242 R252 R253 R255 R258 R259 R260 R261 R262 R263 R265 R266 R268 R269 R270 R271 R272 R274 R275 R276 R277 R278 R279 R280 R281 R282 R283 R285 R286 R287 R288 R314 R316 R317 R318 R319 R320 R321 R322 R323 R324 R326 R327 R328 R329 R330 R331 R332 R333 R334 R335 R336 R337 R338 R339 R340 R341 R342 R343 R344 R345 R346 R347 R348 R349 R350 R351 R352 R353 R354 R355 R356 R357 R358 R359 R400 R401 R402 R403 R404 R405 R406: library part R_0402_1005Metric, "Resistor SMD 0402 (1005 Metric), square (rectangular) end terminal, IPC_7351 nominal, (Body size source: IPC-SM-782 page 72, https://www.pcb-3d.com/wordpress/wp-content/uploads/ipc-sm-782a_amendment_1_and_2.pdf), Alternate KiCad Library", ki_fp_filters=R_*
  R70: Description="External clock input for Audio Drive"
R28 R226: library part R_1206_3216Metric, "Resistor SMD 1206 (3216 Metric), square (rectangular) end terminal, IPC_7351 nominal, (Body size source: IPC-SM-782 page 72, https://www.pcb-3d.com/wordpress/wp-content/uploads/ipc-sm-782a_amendment_1_and_2.pdf), Alternate KiCad Library", ki_fp_filters=R_*
R68 R292 R300 R313: library part R_0805_2012Metric, "Resistor SMD 0805 (2012 Metric), square (rectangular) end terminal, IPC_7351 nominal, (Body size source: IPC-SM-782 page 72, https://www.pcb-3d.com/wordpress/wp-content/uploads/ipc-sm-782a_amendment_1_and_2.pdf), generated with kicad-footprint-generator", ki_fp_filters=R_*
R111 R231 R239: library part R_0603_1608Metric, "Resistor SMD 0603 (1608 Metric), square (rectangular) end terminal, IPC_7351 nominal, (Body size source: IPC-SM-782 page 72, https://www.pcb-3d.com/wordpress/wp-content/uploads/ipc-sm-782a_amendment_1_and_2.pdf), Alternate KiCad Library", ki_fp_filters=R_*
R230 R250 R256 R264 R267 R273 R284: library part R_0805_2012Metric, "Resistor SMD 0805 (2012 Metric), square (rectangular) end terminal, IPC_7351 nominal, (Body size source: IPC-SM-782 page 72, https://www.pcb-3d.com/wordpress/wp-content/uploads/ipc-sm-782a_amendment_1_and_2.pdf), Alternate KiCad Library", ki_fp_filters=R_*
R238: library part R_0603_1608Metric, "Resistor SMD 0603 (1608 Metric), square (rectangular) end terminal, IPC_7351 nominal, (Body size source: IPC-SM-782 page 72, https://www.pcb-3d.com/wordpress/wp-content/uploads/ipc-sm-782a_amendment_1_and_2.pdf), generated with kicad-footprint-generator", ki_fp_filters=R_*
R241: library part R_1206_3216Metric_Pad1.30x1.75mm_HandSolder, "Resistor SMD 1206 (3216 Metric), square (rectangular) end terminal, IPC_7351 nominal with elongated pad for handsoldering. (Body size source: IPC-SM-782 page 72, https://www.pcb-3d.com/wordpress/wp-content/uploads/ipc-sm-782a_amendment_1_and_2.pdf), generated with kicad-footprint-generator", ki_fp_filters=R_*
R243 R244 R245 R246 R247 R248 R249 R251 R254 R257 R289 R290 R291 R293 R294 R295 R296 R297 R298 R299 R301 R302 R303 R304 R305 R306 R307 R308 R309 R310 R311 R312 R315 R325 R360 R361 R362 R363 R364 R365 R366 R367 R368 R369 R370 R371 R372 R373 R374 R375 R376 R377 R378 R379 R380 R381 R382 R383 R384 R385 R386 R387 R388 R389 R390 R391 R392 R393 R394 R395 R396 R397 R398 R399 R407 R408 R409 R410 R411 R412 R413: library part R_0402_1005Metric, "Resistor SMD 0402 (1005 Metric), square (rectangular) end terminal, IPC_7351 nominal, (Body size source: IPC-SM-782 page 72, https://www.pcb-3d.com/wordpress/wp-content/uploads/ipc-sm-782a_amendment_1_and_2.pdf), generated with kicad-footprint-generator", ki_fp_filters=R_*
SW1: library part Switch
SW2: library part LidSwitch
U1 U9 U14 U15 U23 U24 U25 U29 U37 U52 U58 U60 U65: library part SOT-353, "SOT-353, SC-70-5"
  U1 U14 U15 U23 U52 U58: ki_fp_filters="SOT?23* SOT?553*"
  U9 U25 U37 U65: ki_fp_filters="SOT* SG-*"
  U24 U60: ki_fp_filters="SOT?23* Texas?R-PDSO-G5?DCK* Texas?R-PDSO-N5?DRL* Texas?X2SON*0.8x0.8mm*P0.48mm*"
  U29: ki_fp_filters=SOT?23*
U2 U19 U20 U26 U38 U39: library part sso-8
  U2 U20 U26 U38 U39: ki_fp_filters="SSOP* VSSOP*"
  U19: ki_fp_filters=VSSOP*
U3: library part IRDA
U4: library part QFN-52
U5 U18 U30 U32 U34 U40 U54 U56 U57 U62 U64 U66 U68 U71: library part TSSOP-14_4.4x5mm_P0.65mm, "TSSOP, 14 Pin (JEDEC MO-153 Var AB-1 https://www.jedec.org/document_search?search_api_views_fulltext=MO-153), generated with kicad-footprint-generator ipc_gullwing_generator.py"
  U5 U18 U30 U32 U34 U40 U68: ki_fp_filters=DIP*W7.62mm*
  U54: Datasheet=https://github.com/ahmadexp/PC110-Mainboard-Schematic/blob/main/datasheets/bottom/b-v74.pdf, Description="Dual D-Type Positive-Edge-Triggered Flip-Flops With Clear and Preset", ki_fp_filters=DIP*W7.62mm*
  U56: ki_fp_filters=DIP?14*
  U57 U62: Datasheet=https://github.com/ahmadexp/PC110-Mainboard-Schematic/blob/main/datasheets/bottom/a%26e-V125.pdf, Description="ABT QUADRUPLE BUS BUFFER WITH 3STATE OUTPUTS", ki_fp_filters=DIP*W7.62mm*
  U64: Datasheet=https://github.com/ahmadexp/PC110-Mainboard-Schematic/blob/main/datasheets/bottom/g-V126.pdf, Description="Quadruple Bus Buffer Gates With 3-State Outputs", ki_fp_filters=DIP*W7.62mm*
  U66: Datasheet=https://github.com/ahmadexp/PC110-Mainboard-Schematic/blob/main/datasheets/bottom/f-V02.pdf, Description="Quadruple 2-Input Positive-NOR Gates", ki_fp_filters="SO14* DIP*W7.62mm*"
  U71: Datasheet=https://github.com/ahmadexp/PC110-Mainboard-Schematic/blob/main/datasheets/bottom/d-V32.pdf, Description="Quadruple 2-Input Positive-Or Gates", ki_fp_filters=DIP?14*
U6: library part QFN-80
U7: library part TSSOP-24_6.1x7.8mm_P0.65mm, "TSSOP, 24 Pin (JEDEC MO-153 Var DA https://www.jedec.org/document_search?search_api_views_fulltext=MO-153), generated with kicad-footprint-generator ipc_gullwing_generator.py"
U8: library part GRAMchip
U10: library part SOP-24
U11 U44: library part soic-8-small, ki_fp_filters="SOIC*3.9x4.9mm*P1.27mm* DIP*W7.62mm* TO*99* OnSemi*Micro8* TSSOP*3x3mm*P0.65mm* TSSOP*4.4x3mm*P0.65mm* MSOP*3x3mm*P0.65mm* SSOP*3.9x4.9mm*P0.635mm* LFCSP*2x2mm*P0.5mm* *SIP* SOIC*5.3x6.2mm*P1.27mm*"
U12: library part SOIC-8-narrow, Datasheet=https://github.com/ahmadexp/Open-Source-PC110/blob/main/datasheets/top/6-LM4861.pdf, Description="Audio Amp", ki_fp_filters="MSOP*3x3mm*P0.65mm* SOIC*3.9x4.9mm*P1.27mm*"
U13 U16 U17 U31 U50: library part SOT-23-5, "SOT, 5 Pin (JEDEC MO-178 Var AA https://www.jedec.org/document_search?search_api_views_fulltext=MO-178), generated with kicad-footprint-generator ipc_gullwing_generator.py"
U21: library part Bowman
U22: library part FDC
U27: library part Flash-32
U28 U33: library part RAMchip
U35: library part Pluto
U36: library part SOP48
U41: library part SanDisk
U42: library part QFN-100
U43: library part LCD, ki_fp_filters=Connector*:*_1x??_*
U45: library part TSSOP-16_4.4x5mm_P0.65mm, "TSSOP, 16 Pin (https://www.jedec.org/document_search?search_api_views_fulltext=MO-153), generated with kicad-footprint-generator ipc_gullwing_generator.py", ki_fp_filters=DIP?16*
U46: library part SOP-16, "SOP, 16 Pin (https://toshiba.semicon-storage.com/info/docget.jsp?did=12855&prodName=TLP290-4), generated with kicad-footprint-generator ipc_gullwing_generator.py"
U47 U48: library part SOIC-8, "SOIC, 8 Pin (JEDEC MS-012AA, https://www.analog.com/media/en/package-pcb-resources/package/pkg_pdf/soic_narrow-r/r_8.pdf), generated with kicad-footprint-generator ipc_gullwing_generator.py"
  U47: ki_fp_filters="SOIC*3.9x4.9mm*P1.27mm* DIP*W7.62mm* MSOP*3x3mm*P0.65mm* SSOP*2.95x2.8mm*P0.65mm* TSSOP*3x3mm*P0.65mm* VSSOP*P0.5mm* TO?99*"
  U48: Description="Digital Rheostat"
U49 U72: library part SSOP-24_5.3x8.2mm_P0.65mm, "24-Lead Plastic Shrink Small Outline (SS)-5.30 mm Body [SSOP] (see Microchip Packaging Specification 00000049BS.pdf)", Datasheet=https://github.com/ahmadexp/PC110-Mainboard-Schematic/blob/main/datasheets/bottom/8-HD151015.pdf, Description="9 bit Level Shifter/Transceiver With 3 State Outputs"
U51: library part EIAJ160, "PQFP, 160 pins, 28mm sq body, 0.65mm pitch (https://www.altera.com/content/dam/altera-www/global/en_US/pdfs/literature/ds/pkgds.pdf, http://www.nxp.com/docs/en/application-note/AN4388.pdf)"
U53 U55: library part TSOP-5_1.65x3.05mm_P0.95mm, "TSOP-5 package (comparable to TSOT-23), https://www.vishay.com/docs/71200/71200.pdf"
U59: library part Flash-40
U61: library part QFP208, "PQFP, 208 pins, 28mm sq body, 0.5mm pitch (https://www.altera.com/content/dam/altera-www/global/en_US/pdfs/literature/ds/pkgds.pdf, http://www.nxp.com/docs/en/application-note/AN4388.pdf)"
U63: library part SOIC-16W, "SOIC, 16 Pin (http://www.ti.com/lit/ml/msop002a/msop002a.pdf), generated with kicad-footprint-generator ipc_gullwing_generator.py"
U67: library part QFN64, Description="Keyboard controller"
U69: library part SSOP-8_2.95x2.8mm_P0.65mm, "SSOP-8 2.9 x2.8mm Pitch 0.65mm", Datasheet=https://github.com/ahmadexp/PC110-Mainboard-Schematic/blob/main/datasheets/bottom/h-7W32.pdf, Description="Dual 2-Input Positive-OR Gate", ki_fp_filters="SSOP* VSSOP*"
U70: library part TSSOP-30_6.1x9.7mm_P0.65mm, "TSSOP, 30 Pin (JEDEC MO-153 Var DB-1 https://www.jedec.org/document_search?search_api_views_fulltext=MO-153), generated with kicad-footprint-generator ipc_gullwing_generator.py", Datasheet=https://github.com/ahmadexp/PC110-Mainboard-Schematic/blob/main/datasheets/bottom/12-TPS2201.PDF, Description="Dual-Slot PC Card Power-Interface Switches"
U73: library part TSSOP-20_4.4x6.5mm_P0.65mm, "TSSOP, 20 Pin (JEDEC MO-153 Var AC https://www.jedec.org/document_search?search_api_views_fulltext=MO-153), generated with kicad-footprint-generator ipc_gullwing_generator.py", Datasheet=https://github.com/ahmadexp/PC110-Mainboard-Schematic/blob/main/datasheets/bottom/c-V244.pdf, Description="ABT OCTAL BUFFER/DRIVER", ki_fp_filters=DIP?20*
U74: library part LQFP208, "LQFP208; plastic low profile quad flat package; 208 leads; body 28 x 28 x 1.4 mm (see NXP sot459-1_po.pdf and sot459-1_fr.pdf)"
U75: library part SSOP-28, Description="Trackpad Controller"
U76: library part PGA168
X1: library part XTAL-2
X2: library part XTAL-1, ki_fp_filters=Crystal*
X3: library part XTAL-3, ki_fp_filters=Crystal*
X4: library part XTAL-6, ki_fp_filters=Crystal*
X5: library part XTAL-5, ki_fp_filters=Crystal*
X6: library part XTAL-4, ki_fp_filters=Crystal*

## Via types
v1: diameter 0.4, hole 0.3, FC1 to BC1, 3240 vias

## Nets (pads, with @x,y where several pads share a name; then routed paths per layer and width w, separated by ;. In a path a pad name is that pad's centre, name@x,y a point inside that pad or via, vN(x,y) a via of type N, cw(c..) or ccw(c..) an arc to the next point about the centre after c; other vN are vias at no path point)
A5VDET: J10.19 U74.3 | length 52.7
  FC1 w0.15: U74.3@158.308,52.619 158.308,50.775 v1(158.318,50.764)
  FC3 w0.15: v1(151.379,14.707) 151.537,14.549 155.047,14.549 157.074,12.522 160.147,12.522 160.524,12.899 160.524,21.26 161.061,21.797 161.061,36.805 159.662,38.204 159.662,43.132 158.624,44.17 158.624,50.459 v1(158.318,50.764)
  BC1 w0.15: v1(151.379,14.707) J10.19@151.379,16.129
ABVD1: J10.59 R163.2 U74.61 | length 45.4
  FC1 w0.15: U74.61@131.658,46.469 132.951,46.469 133.248,46.172 133.248,44.755 138.608,39.395 v1(138.608,24.635)
  IC2 w0.15: 125.979,14.889 125.984,14.884 133.909,22.809 136.782,22.809 v1(138.608,24.635)
  BC1 w0.15: 125.979,14.889 J10.59@125.979,16.129 ; R163.2@137.49,23.09 137.49,23.517 v1(138.608,24.635)
ABVD2: J10.57 R176.2 U74.59 | length 41.6
  FC1 w0.15: v1(130.607,47.473) 130.61,47.469 U74.59@131.658,47.469
  IC4 w0.15: v1(130.607,47.473) 131.547,46.533 134.518,46.533 135.211,45.841 v1(135.211,26.09)
  BC3 w0.15: v1(127.229,18.108) v1(135.211,26.09)
  BC1 w0.15: J10.57@127.229,16.129 v1(127.229,18.108) ; v1(135.211,26.09) R176.2@137.49,26.09
ACA0: J10.58 U74.60 | length 35
  FC1 w0.15: U74.60@131.658,46.969 132.694,46.969 v1(132.893,47.168)
  IC2 w0.15: v1(126.579,40.854) v1(132.893,47.168)
  BC1 w0.15: J10.58@126.579,16.129 v1(126.579,40.854)
ACA1: J10.56 U74.58 | length 38.4
  FC1 w0.15: 127.879,17.364 127.899,17.364 128.27,16.993 130.556,16.993 130.734,17.17 130.734,25.019 129.718,26.035 129.718,32.817 128.169,34.366 128.169,38.912 128.422,39.166 128.422,45.978 130.414,47.969 U74.58@131.658,47.969
  BC1 w0.15: J10.56@127.879,16.129 127.879,17.364
ACA2: J10.54 U74.57 | length 34.4
  FC1 w0.15: v1(130.607,48.463) 130.613,48.469 U74.57@131.658,48.469
  FC3 w0.15: v1(129.129,17.374) 129.972,18.216 129.972,36.17 130.226,36.424 130.226,37.414 130.124,37.516 130.124,42.062 130.48,42.418 130.48,44.806 130.15,45.136 130.15,48.006 v1(130.607,48.463)
  BC1 w0.15: J10.54@129.129,16.129 v1(129.129,17.374)
ACA3: J10.52 U74.55 | length 36.4
  FC1 w0.15: 130.379,17.373 127.939,19.813 127.939,46.314 130.734,49.109 130.734,49.342 130.861,49.469 U74.55@131.658,49.469
  BC1 w0.15: J10.52@130.379,16.129 130.379,17.373
ACA4: J10.50 U74.53 | length 35.7
  FC1 w0.15: v1(130.632,50.241) 130.86,50.469 U74.53@131.658,50.469
  FC3 w0.15: v1(130.632,50.241) 131.674,49.2 v1(131.674,17.374)
  BC1 w0.15: v1(131.674,17.374) 131.679,17.368 J10.50@131.679,16.129
ACA5: J10.48 U74.50 | length 45.1
  FC1 w0.15: v1(132.055,55.373) 134.773,55.373 134.808,55.338 U74.50@134.808,52.619
  FC3 w0.15: v1(132.055,55.373) 132.055,21.677 v1(132.929,20.803)
  BC1 w0.15: J10.48@132.929,16.129 v1(132.929,20.803)
ACA6: J10.46 U74.49 | length 38.8
  FC1 w0.15: U74.49@135.308,52.619 135.308,51.587 v1(135.567,51.328)
  FC3 w0.15: v1(134.229,17.364) 134.229,18.271 135.312,19.354 135.667,19.354 135.82,19.507 135.82,20.321 134.951,21.191 134.951,22.022 136.223,23.295 136.223,24.84 136.449,25.066 136.449,50.447 v1(135.567,51.328)
  BC1 w0.15: J10.46@134.229,16.129 v1(134.229,17.364)
ACA7: J10.44 U74.47 | length 44.3
  FC1 w0.15: v1(134.722,50.47) 135.738,50.47 136.308,51.04 U74.47@136.308,52.619
  FC3 w0.15: v1(134.722,50.47) 134.722,52.019 135.128,52.426 136.525,52.426 136.931,52.019 136.931,25.146 137.366,24.711 137.366,23.117 136.677,22.428 136.677,18.567 v1(135.479,17.369)
  BC1 w0.15: J10.44@135.479,16.129 v1(135.479,17.369)
ACA8: J10.24 U74.30 | length 40
  FC1 w0.15: U74.30@144.808,52.619 144.808,53.419 v1(145.059,53.67)
  BC1 w0.15: v1(145.059,53.67) 145.059,52.629 146.888,50.8 146.888,19.35 148.179,18.059 J10.24@148.179,16.129
ACA9: J10.22 U74.28 | length 40.1
  FC1 w0.15: U74.28@145.808,52.619 145.808,53.442 v1(146.037,53.67)
  FC3 w0.15: v1(146.037,53.67) 146.037,51.779 146.939,50.876 146.939,23.52 147.893,22.566 147.893,21.728 v1(149.479,20.142)
  BC1 w0.15: J10.22@149.479,16.129 v1(149.479,20.142)
ACA10: J10.16 U74.21 | length 39.1
  FC1 w0.15: U74.21@149.308,52.619 149.308,51.784 v1(149.504,51.587)
  FC3 w0.15: v1(149.504,51.587) 149.504,26.872 150.291,26.085 150.291,22.758 150.698,22.352 152.273,22.352 152.679,21.946 152.679,20.488 v1(153.279,19.888)
  BC1 w0.15: J10.16@153.279,16.129 v1(153.279,19.888)
ACA11: J10.20 U74.25 | length 44.5
  FC1 w0.15: U74.25@147.308,52.619 147.308,51.777 v1(147.498,51.587)
  IC3 w0.15: v1(147.498,51.587) 147.498,34.696 157.175,25.019 157.175,22.25 155.245,20.32 153.086,20.32 v1(150.729,17.963)
  BC1 w0.15: J10.20@150.729,16.129 v1(150.729,17.963)
ACA12: J10.42 U74.45 | length 41.8
  FC1 w0.15: U74.45@137.308,52.619 137.308,50.177 138.006,49.479 v1(138.074,49.479)
  FC3 w0.15: v1(136.729,14.529) 137.566,14.529 137.77,14.733 137.77,16.967 137.262,17.475 137.262,18.338 138.253,19.329 138.253,24.99 138.472,25.209 138.472,49.082 v1(138.074,49.479)
  BC1 w0.15: v1(136.729,14.529) J10.42@136.729,16.129
ACA13: J10.26 U74.33 | length 38.3
  FC1 w0.15: v1(143.308,51.589) U74.33@143.308,52.619
  FC3 w0.15: v1(143.308,51.589) 144.96,49.937 144.96,24.781 144.613,24.434 144.613,23.264 144.932,22.945 144.932,19.345 v1(146.533,17.745)
  BC1 w0.15: v1(146.533,17.745) 146.929,17.348 J10.26@146.929,16.129
ACA14: J10.28 U74.35 | length 39.9
  FC1 w0.15: v1(142.308,51.392) U74.35@142.308,52.619
  BC1 w0.15: v1(142.308,51.392) 143.789,49.911 145.898,49.911 146.558,49.251 146.558,22.758 145.948,22.149 145.948,17.668 145.629,17.348 J10.28@145.629,16.129
ACA15: J10.40 U74.43 | length 37.4
  FC1 w0.15: U74.43@138.308,52.619 138.308,50.82 138.702,50.427
  FC3 w0.15: v1(137.719,17.678) 138.99,18.949 138.99,48.414 138.702,48.702 138.702,50.427
  BC1 w0.15: v1(137.719,17.678) 138.029,17.368 J10.40@138.029,16.129
ACA16: J10.38 U74.41 | length 38.5
  FC1 w0.15: v1(138.709,50.952) 139.308,51.551 U74.41@139.308,52.619
  FC3 w0.15: v1(137.287,20.066) 137.997,20.776 137.997,25.22 138.125,48.718 137.719,49.124 137.719,50.089 138.582,50.952 v1(138.709,50.952)
  IC1 w0.15: v1(137.287,20.066) 139.268,18.085 139.268,17.384 139.279,17.374
  BC1 w0.15: J10.38@139.279,16.129 139.279,17.374
ACA17: J10.25 U74.32 | length 43
  FC1 w0.15: U74.32@143.808,52.619 143.808,53.663 v1(143.815,53.67)
  FC3 w0.15: v1(143.815,53.67) 145.096,52.389 145.096,51.153 145.218,51.031 145.218,24.376 144.843,24.001 144.843,23.635 145.866,22.612 145.866,19.752 147.193,18.426 147.193,14.91 147.32,14.91
  BC1 w0.15: 147.32,14.91 147.529,15.119 J10.25@147.529,16.129
ACA18: J10.27 U74.34 | length 42.5
  FC1 w0.15: U74.34@142.808,52.619 142.808,53.661
  FC3 w0.15: 142.808,53.661 142.799,53.67 142.799,51.275 144.047,50.028 144.047,22.781 144.678,22.149 144.678,16.485 v1(146.279,14.884)
  BC1 w0.15: v1(146.279,14.884) J10.27@146.279,16.129
ACA19: J10.29 U74.36 | length 46.8
  FC1 w0.15: v1(139.827,49.479) 140.233,49.479 141.808,51.054 U74.36@141.808,52.619
  FC3 w0.15: v1(139.827,49.479) 139.827,48.785 139.45,48.408 139.45,23.176 140.208,22.418 140.208,14.402 140.614,13.995 v1(144.979,13.995)
  BC1 w0.15: v1(144.979,13.995) J10.29@144.979,16.129
ACA20: J10.31 U74.38 | length 44.5
  FC1 w0.15: v1(140.462,54.178) 140.808,53.832 U74.38@140.808,52.619
  FC3 w0.15: v1(140.462,54.178) 141.765,52.875 141.765,51.072 142.835,50.002 142.835,25.145 142.647,24.957 142.647,24.236 142.835,24.048 142.835,21.02 144.424,19.431 144.424,15.281 v1(144.043,14.9)
  BC1 w0.15: J10.31@143.729,16.129 143.729,14.91 143.739,14.9 v1(144.043,14.9)
ACA21: J10.33 U74.40 | length 40.8
  FC1 w0.15: v1(139.605,50.724) 139.808,50.927 U74.40@139.808,52.619
  FC3 w0.15: v1(139.605,50.724) 140.461,49.867 140.461,15.774 v1(141.351,14.884)
  BC1 w0.15: v1(141.351,14.884) 142.24,14.884 142.479,15.123 J10.33@142.479,16.129
ACA22: J10.39 U74.42 | length 41.7
  FC1 w0.15: U74.42@138.808,52.619 138.808,53.667 v1(138.811,53.67)
  FC3 w0.15: v1(138.43,14.884) 138.43,17.438 139.22,18.228 139.22,53.262 v1(138.811,53.67)
  BC1 w0.15: v1(138.43,14.884) 138.629,15.083 J10.39@138.629,16.129
ACA23: J10.41 U74.44 | length 42
  FC1 w0.15: U74.44@137.808,52.619 137.808,53.658 v1(137.82,53.67)
  FC3 w0.15: 137.379,14.894 136.931,15.342 136.931,22.327 137.643,23.038 137.643,45.06 137.871,45.288 137.871,47.142 137.363,47.65 137.363,53.213 v1(137.82,53.67)
  BC1 w0.15: 137.379,14.894 J10.41@137.379,16.129
ACA24: J10.43 U74.46 | length 54.3
  FC1 w0.15: U74.46@136.808,52.619 136.808,53.394 v1(137.77,54.356)
  FC3 w0.15: v1(134.841,14.587) 134.841,17.468 135.433,18.059 135.738,18.059 136.28,18.602 136.28,20.848 135.75,21.378 135.75,22.44 136.453,23.144 136.453,24.61 136.69,24.848 136.69,51.041 135.89,51.841 135.255,51.841 135.009,51.595 135.009,51.072 135.28,50.8 135.28,50.394 134.96,50.073 134.153,50.073 133.934,50.292 133.934,52.426 134.341,52.832 136.246,52.832 v1(137.77,54.356)
  BC1 w0.15: v1(134.841,14.587) 135.654,14.587 136.079,15.011 J10.43@136.079,16.129
ACA25: J10.45 U74.48 | length 46.9
  FC1 w0.15: v1(135.128,55.728) 135.128,54.229 135.808,53.549 U74.48@135.808,52.619
  FC3 w0.15: v1(135.128,55.728) 133.172,55.728 132.309,54.864 132.309,22.459 134.829,19.939 v1(135.235,19.939)
  BC1 w0.15: J10.45@134.829,16.129 134.829,19.533 v1(135.235,19.939)
ACD0: J10.60 U74.62 | length 42.2
  FC1 w0.15: U74.62@131.658,45.969 132.72,45.969
  FC3 w0.15: 125.329,17.368 126.441,16.256 131.45,16.256 134.778,19.584 135.464,19.584 135.59,19.71 135.59,20.136 135.433,20.294 135.185,20.294 133.223,22.256 133.223,27.095 133.452,27.324 133.452,45.237 132.72,45.969
  BC1 w0.15: J10.60@125.329,16.129 125.329,17.368
ACD1: J10.62 U74.64 | length 33.6
  FC1 w0.15: U74.64@131.658,44.969 132.679,44.969 v1(132.69,44.958)